# Altium PCB PCB1.PcbDoc
Units mm, origin at the board's own origin, x right, y up, seen from the top; angles counter-clockwise.
Board outline 86.99 x 48.13 mm, 2 copper layers (Top Layer, Bottom Layer); 10 components, 16 nets, 56 pads, 0 vias.
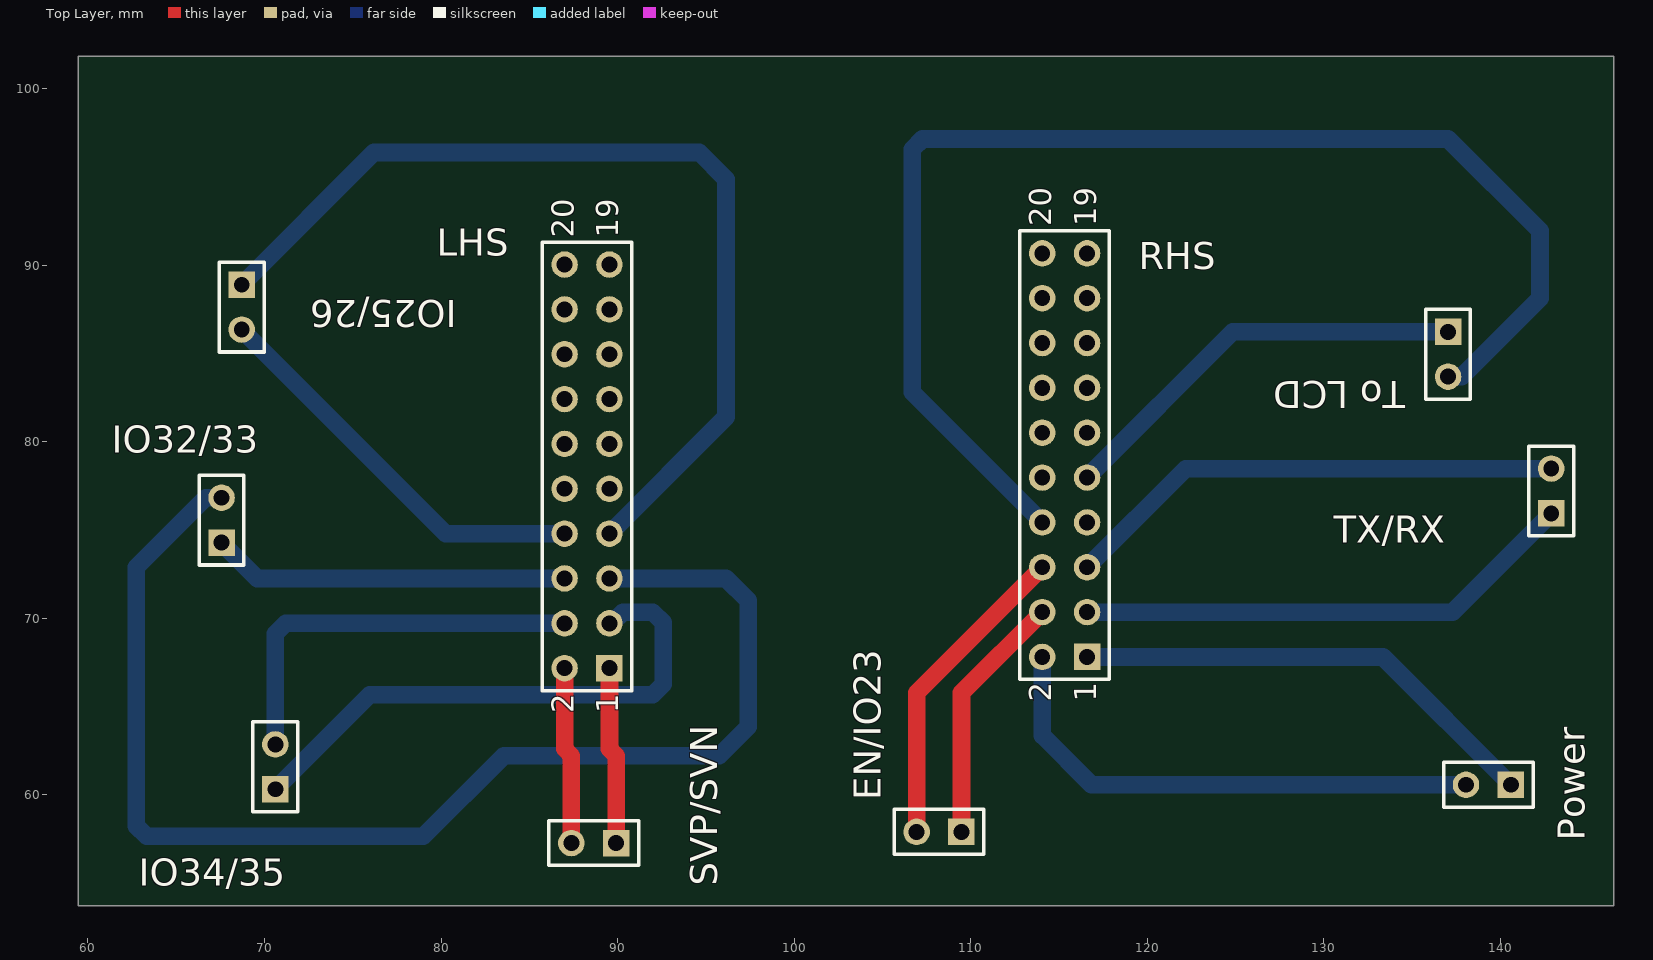
[diagram p0: Top Layer view]
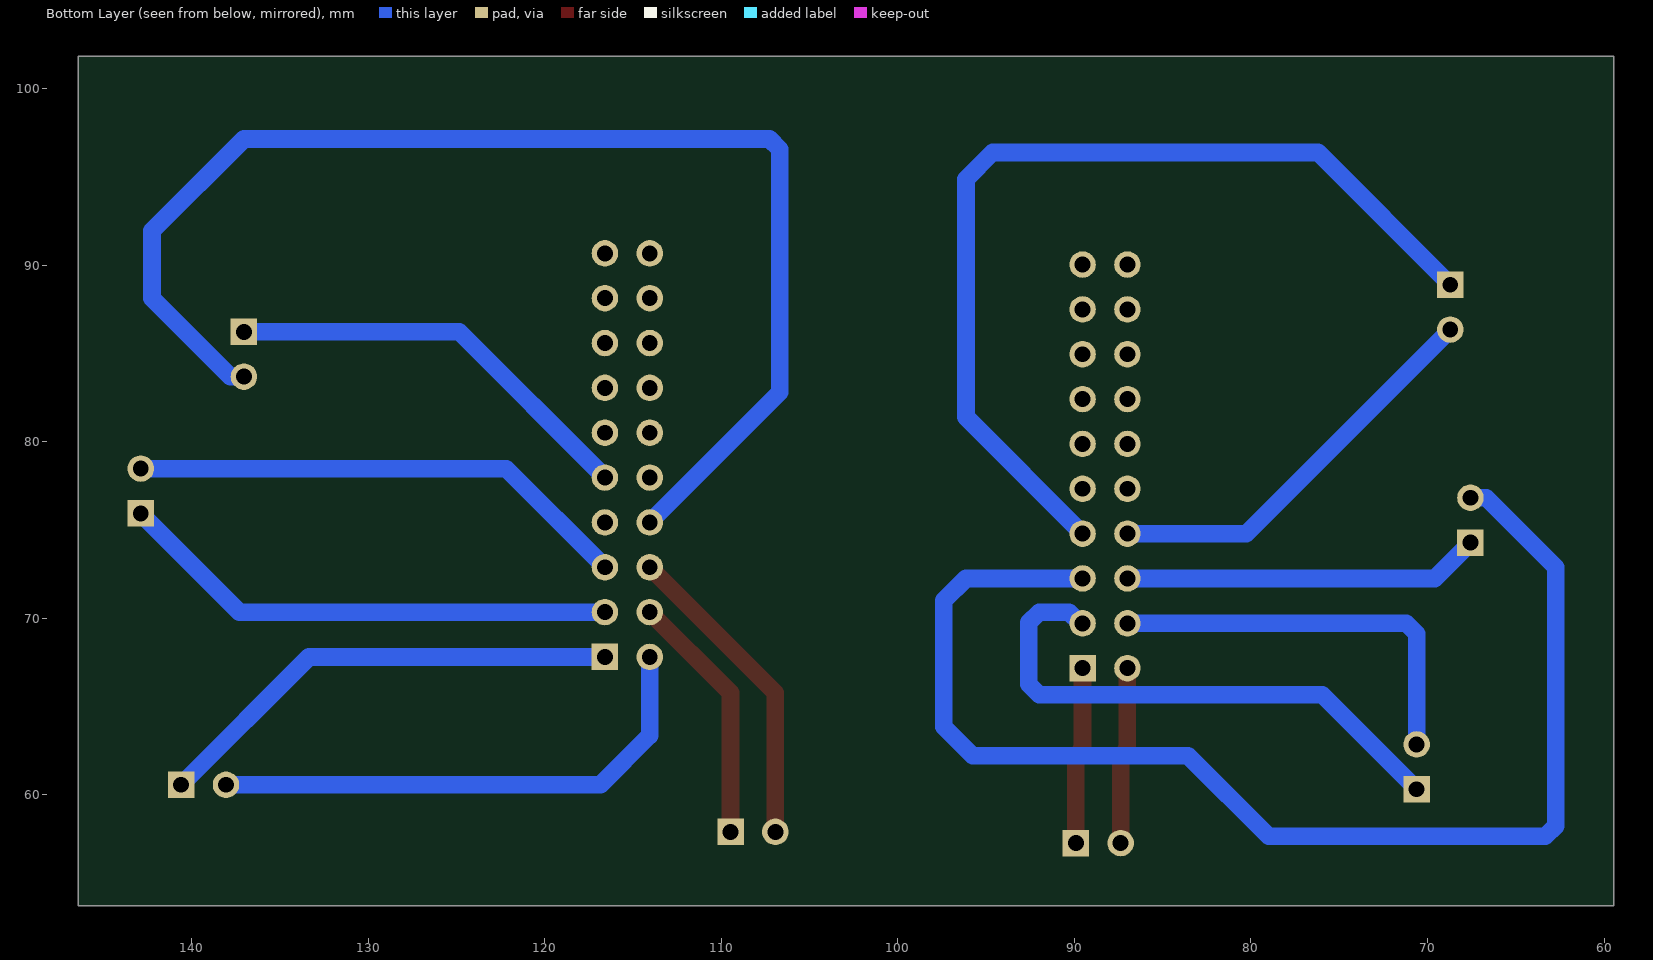
[diagram p1: Bottom Layer view, seen from below]

## Layer stack, top to bottom
Top Solder: solder mask 0.0102, Solder Resist, Dk 3.5
Top Layer: signal copper 0.0356
Dielectric 1: dielectric 0.32, FR-4, Dk 4.8
Bottom Layer: signal copper 0.0356
Bottom Solder: solder mask 0.0102, Solder Resist, Dk 3.5

## Board outline
59.436,53.721 146.431,53.721 146.431,101.854 59.436,101.854

## Design rules (kind name [scope] priority, off if disabled: settings)
Clearance [All] p1: gap=0.254 ignorepadtopadclearanceinfootprint=FALSE except(0: Arc-Hole Track-Hole SMDPad-Hole THPad-Hole Via-Hole Fill-Hole Poly-Hole Region-Hole Text-Hole)
PolygonConnect [All] p1: connectstyle=Relief reliefconductorwidth=0.254 reliefentries=4 polygonreliefangle="90 Angle" airgapwidth=0.254
RoomDefinition Sheet1 [InComponentClass('Sheet1')] p1: confinementstyle=ConfineIn formatcopy=TRUE lockcomponents=FALSE outline 59.436,101.727 146.431,101.727 146.431,54.229 146.05,53.848 59.436,53.848
RoutingVias [All] p1: holewidth=0.711 width=1.27 viastyle="Through Hole" minholewidth=0.711 minwidth=1.27 maxholewidth=0.711 maxwidth=1.27
SolderMaskExpansion [All] p1: expansion=0.102 istentingtop=FALSE
Width [All] p1: maxlimit=1.5 minlimit=0.5 preferedwidth=1
30 further rules are at their usual default settings.

## Components (designator, comment, footprint, x,y, rotation, side; value= is the part's Value field where it differs from the comment)
EN/IO23 "7" HDR1X2 109.474,57.912 r180 top
IO25/26 "6" HDR1X2 68.707,88.9 r270 top
IO32/33 "5" HDR1X2 67.564,74.295 r90 top
IO34/35 "4" HDR1X2 70.612,60.325 r90 top
LHS "LH" HDR2X10 89.535,67.183 r90 top
Power "1" HDR1X2 140.589,60.579 r180 top
RHS "RH" HDR2X10 116.586,67.818 r90 top
SVP/SVN "3" HDR1X2 89.916,57.277 r180 top
"To LCD" "8" HDR1X2 137.033,86.233 r270 top
TX/RX "2" HDR1X2 142.875,75.946 r90 top

## Footprints (in the part's own frame and the unit in brackets; to place one, negate y for a bottom-side part, rotate by r counter-clockwise, add the part's x,y. Pads: shape width x height; smd on the part's side, far side on the other; paste and mask are expansions set on the pad)
HDR1X2 [mm] "Connector; Header; 2 Position"
  rect 1.5x1.5 hole 0.9: 1(0,0)
  round 1.5 hole 0.9: 2(2.54,0)
  silkscreen extent -1.27,-1.27 3.81,1.27
HDR2X10 [mm] "Connector; Header; 10x2 Position"
  rect 1.5x1.5 hole 0.9: 1(0,0)
  round 1.5 hole 0.9: 2(0,2.54) 3(2.54,0) 4(2.54,2.54) 5(5.08,0) 6(5.08,2.54) 7(7.62,0) 8(7.62,2.54) 9(10.16,0) 10(10.16,2.54) 11(12.7,0) 12(12.7,2.54) 13(15.24,0) 14(15.24,2.54) 15(17.78,0) 16(17.78,2.54) 17(20.32,0) 18(20.32,2.54) 19(22.86,0) 20(22.86,2.54)
  silkscreen extent -1.27,-1.27 24.13,3.81

## Part data
EN/IO23 IO25/26 IO32/33 IO34/35 Power SVP/SVN "To LCD" TX/RX: library part CMP-307-000070-1, "Header, 2-Pin", Component Type=Standard, Design Item ID="Header 2", LatestRevisionDate=17-Jul-2002, LatestRevisionNote="Re-released for DXP Platform.", Pin Count=2, Publisher="Altium Limited", Source="Miscellaneous Connectors.SchLib"
LHS RHS: library part CMP-307-000024-1, "Header, 10-Pin, Dual row", Component Type=Standard, Design Item ID="Header 10X2", LatestRevisionDate=17-Jul-2002, LatestRevisionNote="Re-released for DXP Platform.", Pin Count=20, Publisher="Altium Limited", Source="Miscellaneous Connectors.SchLib"

## Nets (pads, with @x,y where several pads share a name; then routed paths per layer and width w, separated by ;. In a path a pad name is that pad's centre, name@x,y a point inside that pad or via, vN(x,y) a via of type N, cw(c..) or ccw(c..) an arc to the next point about the centre after c; other vN are vias at no path point)
NetEN/IO23_1: EN/IO23.1 RHS.4 | length 14.3
  Top Layer w1: EN/IO23.1 109.474,65.786 RHS.4
NetEN/IO23_2: EN/IO23.2 RHS.6 | length 17.9
  Top Layer w1: EN/IO23.2 106.934,65.786 RHS.6
NetIO25/26_1: IO25/26.1 LHS.7 | length 54
  Bottom Layer w1: IO25/26.1 76.2,96.393 94.615,96.393 96.139,94.869 96.139,81.407 LHS.7
NetIO25/26_2: IO25/26.2 LHS.8 | length 23.1
  Bottom Layer w1: IO25/26.2 80.264,74.803 LHS.8
NetIO32/33_1: IO32/33.1 LHS.6 | length 20.3
  Bottom Layer w1: IO32/33.1 69.596,72.263 LHS.6
NetIO32/33_2: IO32/33.2 LHS.5 | length 74.1
  Bottom Layer w1: IO32/33.2 66.675,76.835 62.738,72.898 62.738,58.244 63.324,57.658 78.994,57.658 83.566,62.23 95.758,62.23 97.39,63.862 97.39,71.012 96.139,72.263 LHS.5
NetIO34/35_1: IO34/35.1 LHS.3 | length 31.5
  Bottom Layer w1: IO34/35.1 75.966,65.679 91.997,65.679 92.583,66.265 92.583,69.772 91.997,70.358 90.305,70.358 89.67,69.723 LHS.3
NetIO34/35_2: IO34/35.2 LHS.4 | length 22.9
  Bottom Layer w1: IO34/35.2 70.612,69.137 71.198,69.723 LHS.4
NetLHS_1: LHS.1 SVP/SVN.1 | length 10.1
  Top Layer w1: LHS.1 89.535,62.611 89.916,62.23 SVP/SVN.1
NetLHS_2: LHS.2 SVP/SVN.2 | length 10.1
  Top Layer w1: LHS.2 86.995,62.611 87.376,62.23 SVP/SVN.2
NetPower_1: Power.1 RHS.1 | length 27
  Bottom Layer w1: RHS.1 133.35,67.818 Power.1
NetPower_2: Power.2 RHS.2 | length 29.6
  Bottom Layer w1: RHS.2 114.046,63.373 116.84,60.579 Power.2
NetRHS_3: RHS.3 TX/RX.1 | length 28.6
  Bottom Layer w1: RHS.3 137.287,70.358 TX/RX.1
NetRHS_5: RHS.5 TX/RX.2 | length 28.6
  Bottom Layer w1: RHS.5 122.174,78.486 TX/RX.2
NetRHS_8: "To LCD.2" RHS.8 | length 73
  Bottom Layer w1: RHS.8 106.68,82.804 106.68,96.569 107.266,97.155 137.033,97.155 142.24,91.948 142.24,88.138 137.795,83.693 137.033,83.693
NetRHS_9: "To LCD.1" RHS.9 | length 23.9
  Bottom Layer w1: RHS.9 124.841,86.233 137.033,86.233
pads on no net: LHS.9 LHS.10 LHS.11 LHS.12 LHS.13 LHS.14 LHS.15 LHS.16 LHS.17 LHS.18 LHS.19 LHS.20 RHS.7 RHS.10 RHS.11 RHS.12 RHS.13 RHS.14 RHS.15 RHS.16 RHS.17 RHS.18 RHS.19 RHS.20

## Dimensions
86.995,90.043 to 117.094,92.202 on Top Layer

## Text inside footprints (layer, text, board x,y; h text height)
LHS: Top Overlay "20" at 87.503,91.567 h1.27 r90; Top Overlay "19" at 90.043,91.567 h1.27 r90; Top Overlay "1" at 90.043,64.643 h1.27 r90; Top Overlay "2" at 87.503,64.643 h1.27 r90
RHS: Top Overlay "20" at 114.554,92.202 h1.27 r90; Top Overlay "19" at 117.094,92.202 h1.27 r90; Top Overlay "1" at 117.094,65.278 h1.27 r90; Top Overlay "2" at 114.554,65.278 h1.27 r90